# Altium PCB PCB1.PcbDoc (part 1 of 2)
Units mm, origin at the board's own origin, x right, y up, seen from the top; angles counter-clockwise.
Board outline 100 x 100 mm, 2 copper layers (Top Layer, Bottom Layer); 16 components, 62 nets, 154 pads, 23 vias.
Unrouted connection lines stored in the file: 17.
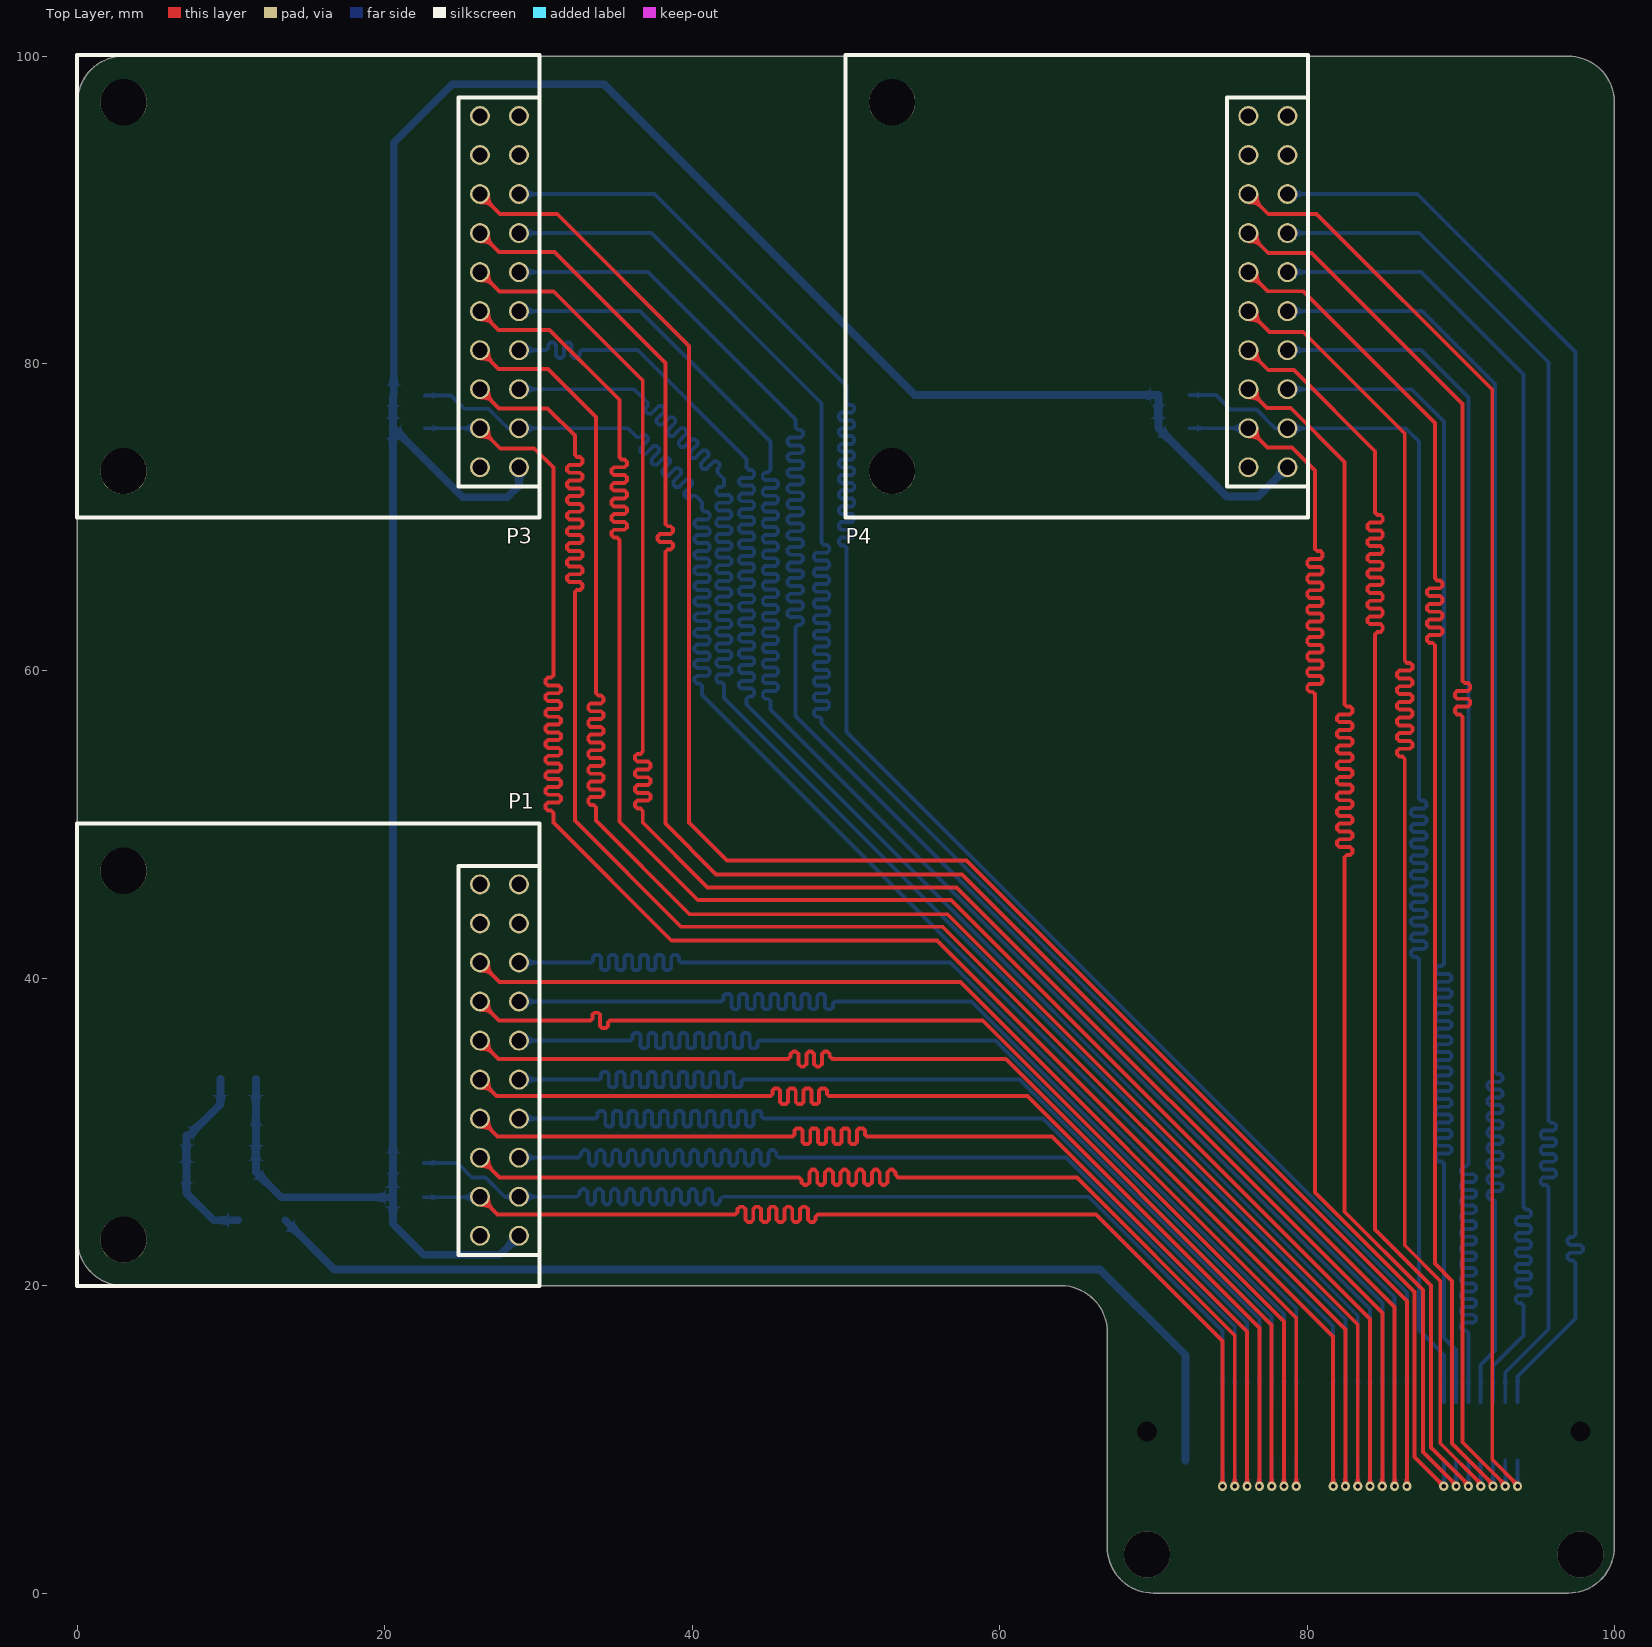
[diagram p0: Top Layer view]
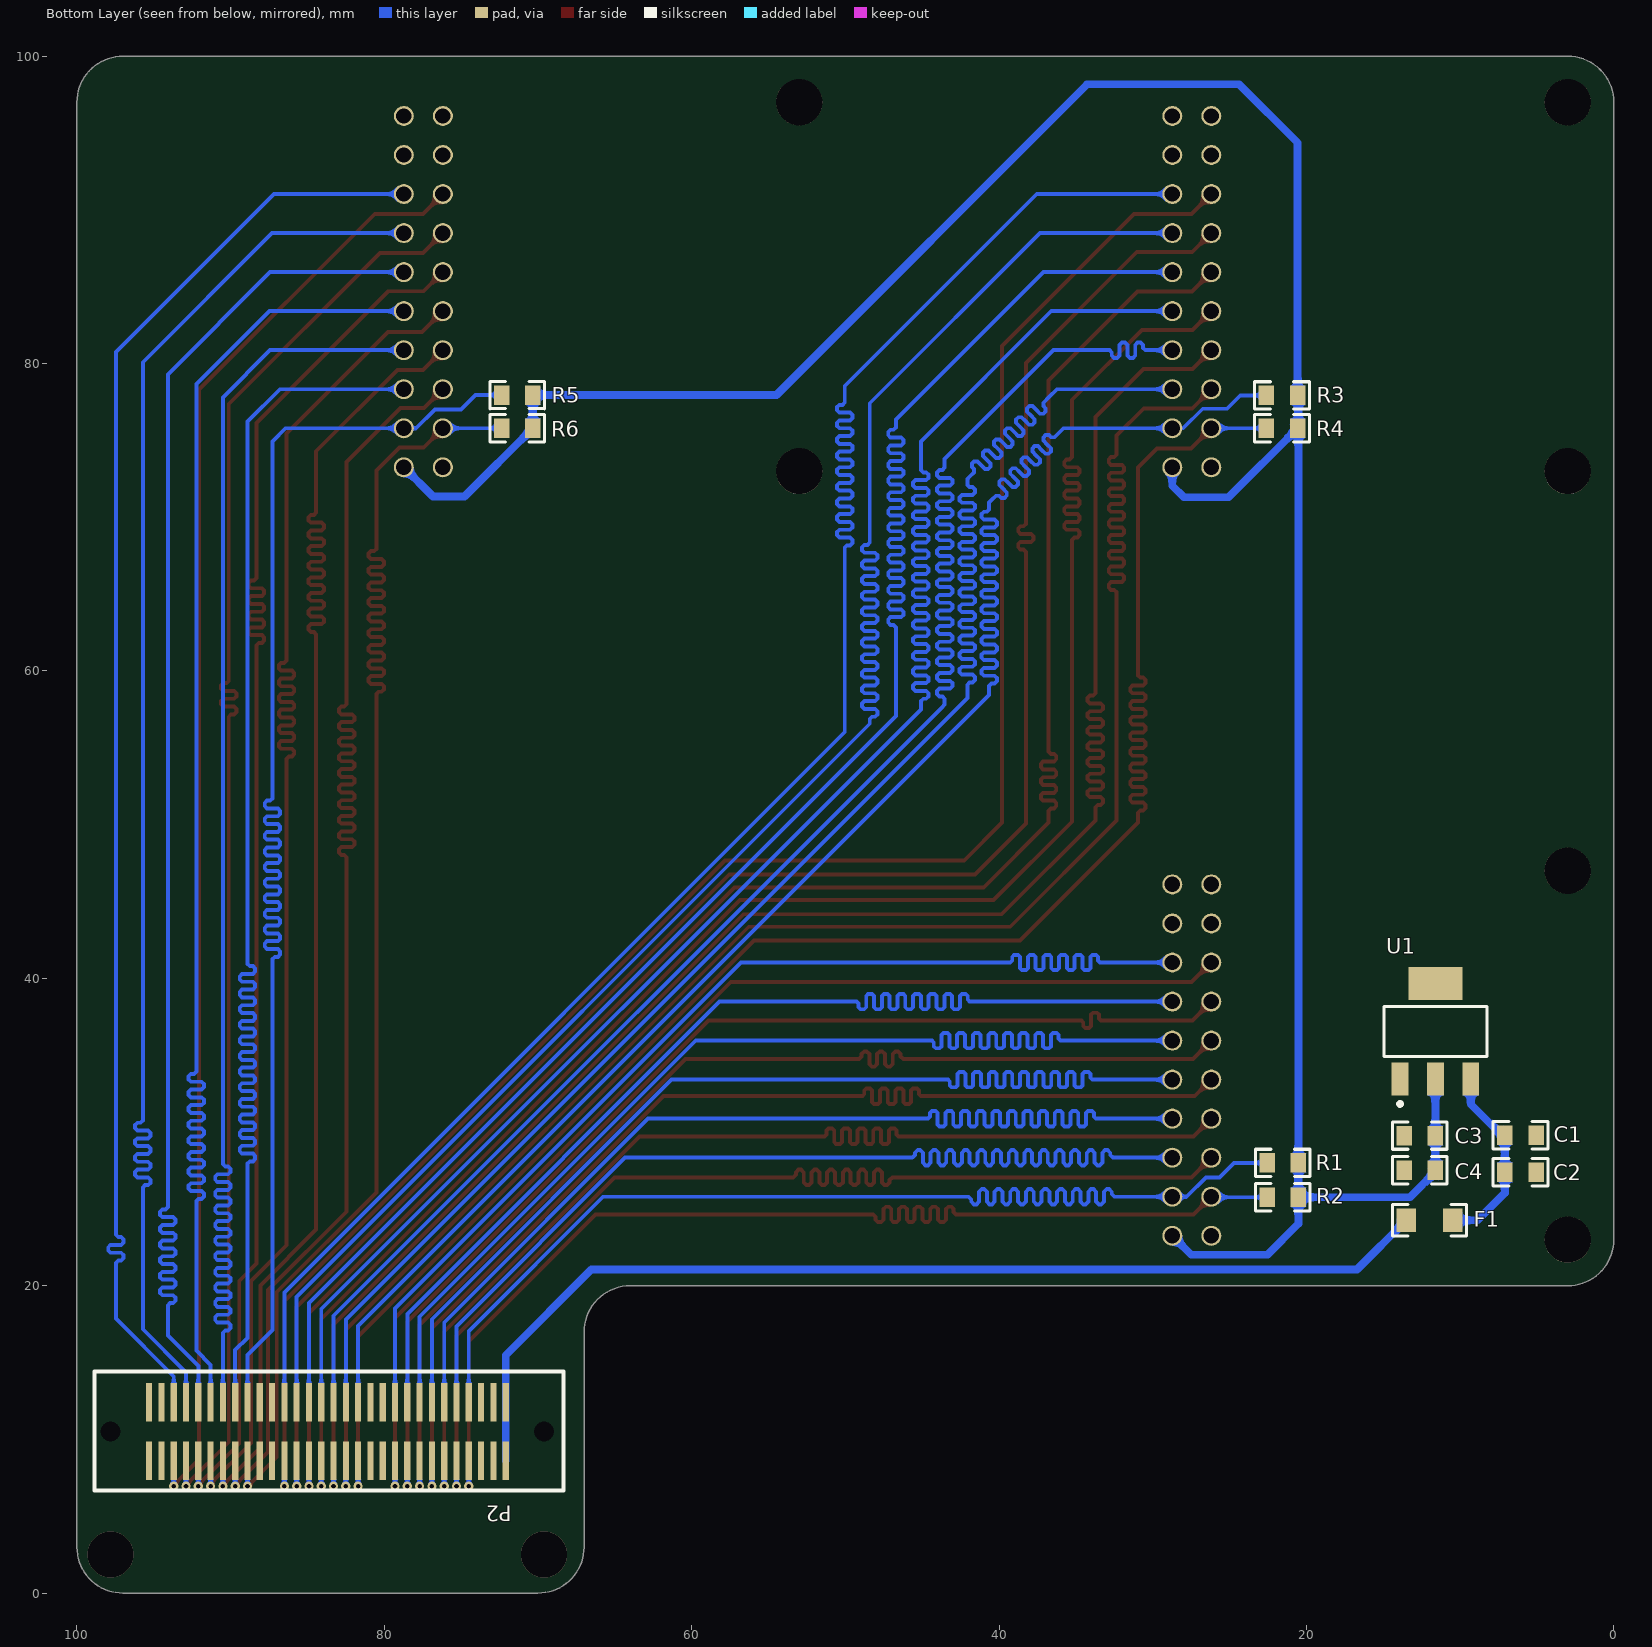
[diagram p1: Bottom Layer view, seen from below]
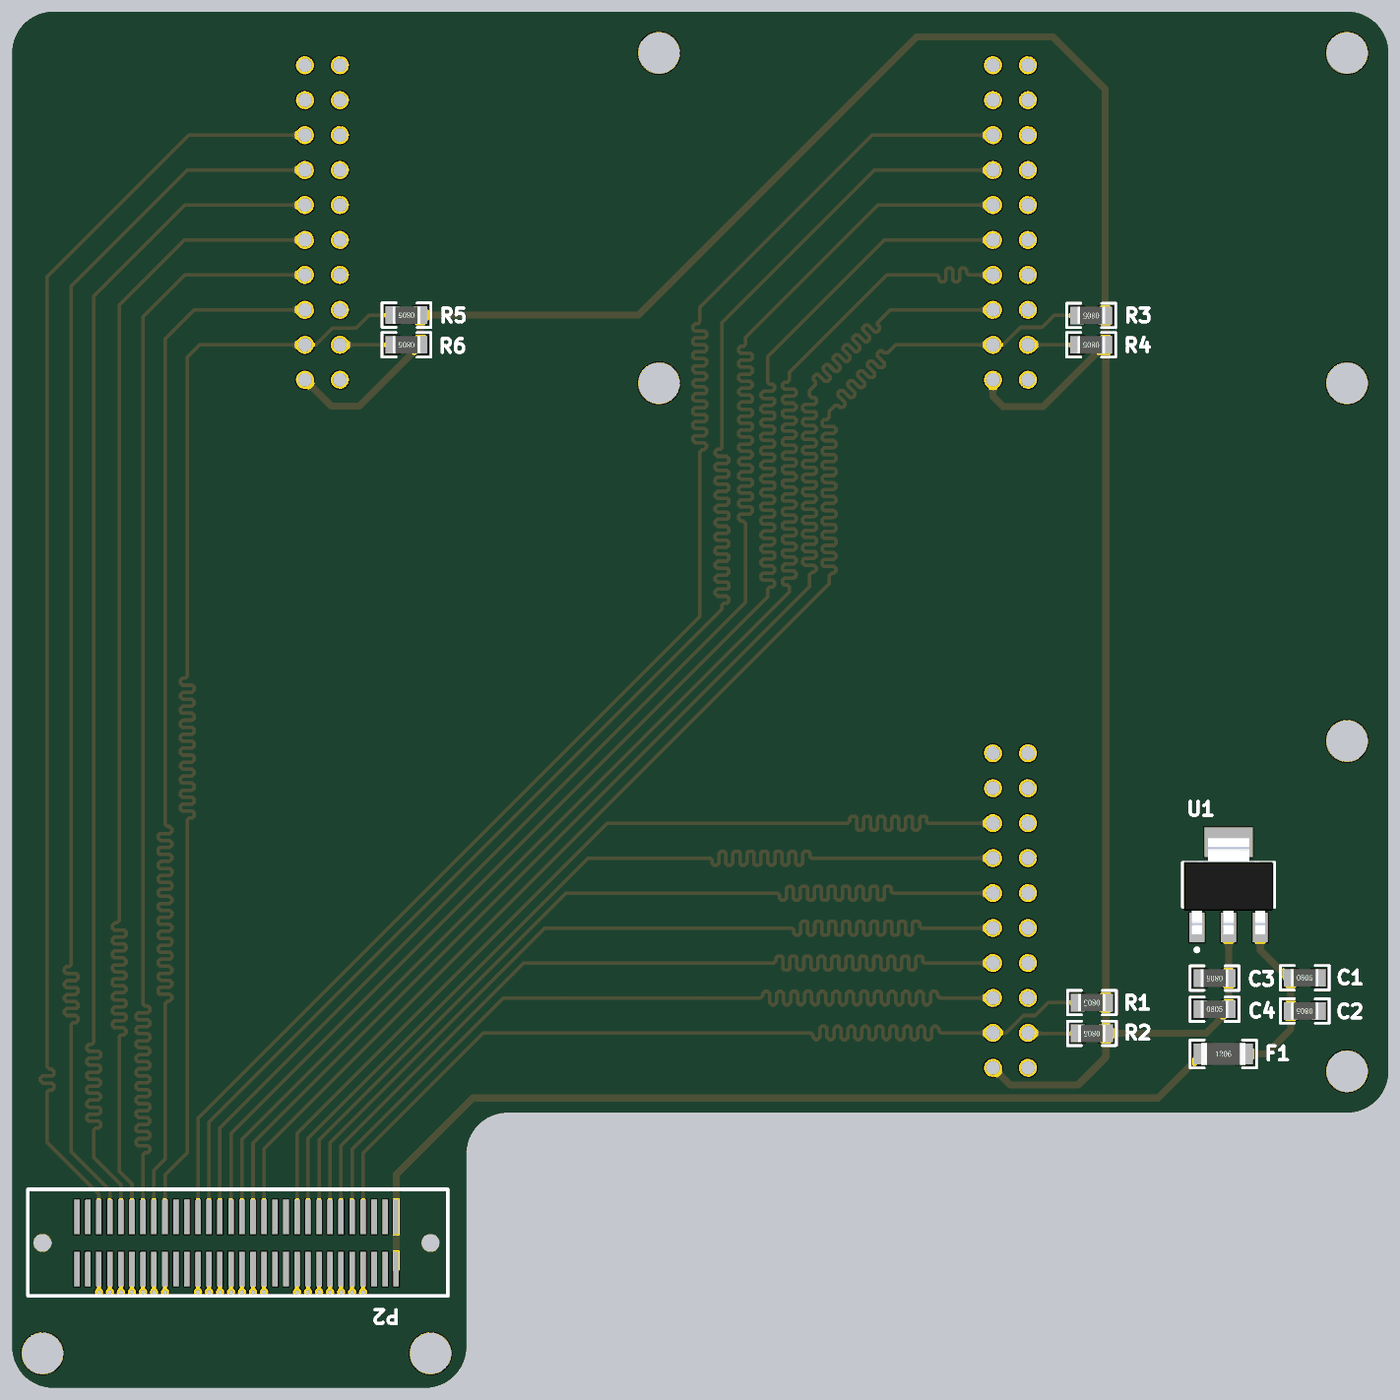
[diagram p3: 3D render of the assembled board from below, using the file's embedded part models]

## Layer stack, top to bottom
Top Solder: solder mask 0.0102, Solder Resist, Dk 3.5
Top Layer: signal copper 0.0356
Dielectric 1: dielectric 0.32, FR-4, Dk 4.8
Bottom Layer: signal copper 0.0356
Bottom Solder: solder mask 0.0102, Solder Resist, Dk 3.5

## Board outline
3,20 cw(c3,23) 0,23 0,97 cw(c3,97) 3,100 97,100 cw(c97,97) 100,97 100,3 cw(c97,3) 97,0 70,0 cw(c70,3) 67,3 67,16.975 ccw(c63.987,16.987) 64,20

## Design rules (kind name [scope] priority, off if disabled: settings)
Clearance [All] p1: gap=0.2
Length Length_2 [InNetClass('C2')] p1: maxlimit=123 minlimit=122
Length Length_1 [InNetClass('C1')] p2: maxlimit=76 minlimit=75
Length Length_3 [InNetClass('C3')] p3: maxlimit=96 minlimit=95
PolygonConnect [All] p1: connectstyle=Relief reliefconductorwidth=0.254 reliefentries=4 polygonreliefangle="90 Angle" airgapwidth=0.254
RoutingVias [All] p1: holewidth=0.3 width=0.6 viastyle="Through Hole" minholewidth=0.3 minwidth=0.6 maxholewidth=6 maxwidth=10
SolderMaskExpansion [All] p1: expansion=0.102
Width [All] p1: maxlimit=0.508 minlimit=0.127 preferedwidth=0.254
30 further rules are at their usual default settings.

## Classes and differential pairs
net class C1: D0_1 D1_1 D2_1 D3_1 D4_1 D5_1 D6_1 D7_1 HS_1 PCLK_1 SCK_1 SDA_1 VS_1 XCLK_1
net class C2: D0_2 D1_2 D2_2 D3_2 D4_2 D5_2 D6_2 D7_2 HS_2 PCLK_2 SCK_2 SDA_2 VS_2 XCLK_2
net class C3: D0_3 D1_3 D2_3 D3_3 D4_3 D5_3 D6_3 D7_3 HS_3 PCLK_3 SCK_3 SDA_3 VS_3 XCLK_3

## Components (designator, comment, footprint, x,y, rotation, side; value= is the part's Value field where it differs from the comment)
C1 "Cap2" R0805 6.071,29.794 r180 bottom
C2 "Cap" R0805 6.071,27.381 r0 bottom
C3 "Cap2" R0805 12.624,29.769 r0 bottom
C4 "Cap" R0805 12.624,27.508 r180 bottom
F1 "Fuse 1" R1206 11.989,24.257 r180 bottom (schematic designator F?)
P1 "Header 10X2" PCBComponent_1 0,20 r90 top locked
P2 "Header 30X2" BTBCON_0.8mm_60P 72.1,12.425 r270 bottom locked
P3 "Header 10X2" PCBComponent_1 0,70 r90 top locked
P4 "Header 10X2" PCBComponent_1 50,70 r90 top locked
R1 "Res1" R0805 21.539,27.991 r0 bottom
R2 "Res1" R0805 21.539,25.756 r0 bottom
R3 "Res1" R0805 21.59,77.927 r0 bottom
R4 "Res1" R0805 21.59,75.794 r0 bottom
R5 "Res1" R0805 71.349,77.953 r0 bottom
R6 "Res1" R0805 71.349,75.794 r0 bottom
U1 "AMS1117-33" "SOT-223   AMS1117" 11.608,36.551 r180 bottom

## Footprints (in the part's own frame and the unit in brackets; to place one, negate y for a bottom-side part, rotate by r counter-clockwise, add the part's x,y. Pads: shape width x height; smd on the part's side, far side on the other; paste and mask are expansions set on the pad)
BTBCON_0.8mm_60P [mm]
  rect 2.5x0.4 smd: 1(0,0) 2(3.8,0) 3(0,-0.8) 4(3.8,-0.8) 5(0,-1.6) 6(3.8,-1.6) 7(0,-2.4) 8(3.8,-2.4) 9(0,-3.2) 10(3.8,-3.2) 11(0,-4) 12(3.8,-4) 13(0,-4.8) 14(3.8,-4.8) 15(0,-5.6) 16(3.8,-5.6) 17(0,-6.4) 18(3.8,-6.4) 19(0,-7.2) 20(3.8,-7.2) 21(0,-8) 22(3.8,-8) 23(0,-8.8) 24(3.8,-8.8) 25(0,-9.6) 26(3.8,-9.6) 27(0,-10.4) 28(3.8,-10.4) 29(0,-11.2) 30(3.8,-11.2) 31(0,-12) 32(3.8,-12) 33(0,-12.8) 34(3.8,-12.8) 35(0,-13.6) 36(3.8,-13.6) 37(0,-14.4) 38(3.8,-14.4) 39(0,-15.2) 40(3.8,-15.2) 41(0,-16) 42(3.8,-16) 43(0,-16.8) 44(3.8,-16.8) 45(0,-17.6) 46(3.8,-17.6) 47(0,-18.4) 48(3.8,-18.4) 49(0,-19.2) 50(3.8,-19.2) 51(0,-20) 52(3.8,-20) 53(0,-20.8) 54(3.8,-20.8) 55(0,-21.6) 56(3.8,-21.6) 57(0,-22.4) 58(3.8,-22.4) 59(0,-23.2) 60(3.8,-23.2)
  round 1 hole 1.3: 61(1.9,2.5) 62(1.9,-25.7)
  silkscreen extent -2,-26.75 5.75,3.75
PCBComponent_1 [mm]
  round 3 hole 3: 0(3,-3) 0(27,-3)
  round 1.3 hole 1: 1(3.251,-28.727) 2(3.251,-26.187) 3(5.791,-28.727) 4(5.791,-26.187) 5(8.331,-28.727) 6(8.331,-26.187) 7(10.871,-28.727) 8(10.871,-26.187) 9(13.411,-28.727) 10(13.411,-26.187) 11(15.951,-28.727) 12(15.951,-26.187) 13(18.491,-28.727) 14(18.491,-26.187) 15(21.031,-28.727) 16(21.031,-26.187) 17(23.571,-28.727) 18(23.571,-26.187) 19(26.111,-28.727) 20(26.111,-26.187)
  silkscreen extent -0.01,-30.06 30.09,0.04
R0805 [mil]
  rect 40x50 smd: 1(-40,0) 2(40,0)
  silkscreen extent -70,-35 70,35, body extent -39,-25 39,25, height 22
R1206 [mil]
  rect 50x60 smd: 1(-60,0) 2(60,0)
  silkscreen extent -95,-40 95,40, body extent -63,-31 63,31, height 24
"SOT-223   AMS1117" [mm] "SOT-223/SC-73; 4 Leads; Body 6.7 x 7.3 mm, inc. leads (LxW max)"
  rect 1.1x2.15 smd: 1(-2.3,-3.1) 2(0,-3.1) 3(2.3,-3.1)
  rect 3.5x2.15 smd: 4(0,3.1)
  silkscreen extent -3.35,-4.85 3.35,1.63, body extent -3.25,-3.58 3.25,3.38, height 1.65

## Part data
C1 C2 C3 C4: "Capacitor"
F1: "Fuse"
P1 P3 P4: "Header, 10-Pin, Dual row"
P2: "Header, 30-Pin, Dual row"
R1 R2 R3 R4 R5 R6: "Resistor"
U1: library part "Volt Reg", "Voltage Regulator"

## Via types
v1: diameter 0.6, hole 0.3, Top Layer to Bottom Layer, 21 vias
v2: diameter 3, hole 3, Top Layer to Bottom Layer, 2 vias

## Nets (pads, with @x,y where several pads share a name; then routed paths per layer and width w, separated by ;. In a path a pad name is that pad's centre, name@x,y a point inside that pad or via, vN(x,y) a via of type N, cw(c..) or ccw(c..) an arc to the next point about the centre after c; other vN are vias at no path point)
3V3: C3.1 C4.2 P1.1 P3.1 P4.1 R1.1 R2.1 R3.1 R4.1 R5.1 R6.1 U1.2 | length 180
  Bottom Layer w0.508: U1.2@11.608,33.451 C4.2@11.608,27.508 11.608,27.407 13.259,25.756 R2.1@20.523,25.756 ; R4.1@20.574,75.794 25.07,71.298 27.965,71.298 28.727,72.06 P3.1@28.727,73.251 ; P1.1@28.727,23.251 27.498,22.022 22.53,22.022 20.523,24.028 R2.1@20.523,25.756 ; P4.1@78.727,73.251 76.825,71.349 74.778,71.349 R6.1@70.333,75.794 R5.1@70.333,77.953 54.483,77.953 34.29,98.146 34.29,98.171 24.384,98.171 20.574,94.361 R3.1@20.574,77.927 20.523,77.876 R1.1@20.523,27.991 R2.1@20.523,25.756
5V: F1.1 P2.1 P2.2 | length 69.1
  Bottom Layer w0.508: F1.1@13.513,24.257 16.713,21.057 66.523,21.057 72.1,15.479 P2.1@72.1,12.425 P2.2@72.1,8.625
D0_1: P1.16 P2.20 | length 75.3
  Top Layer w0.254: P1.16@26.187,41.031 27.468,39.751 57.455,39.751 79.3,17.906 v1(79.3,6.948)
  Bottom Layer w0.254: v1(79.3,6.948) 79.3,7.17 P2.20@79.3,8.625
D0_2: P2.38 P3.16 | length 122.1
  Top Layer w0.254: P3.16@26.187,91.031 27.48,89.738 31.217,89.738 39.802,81.153 39.802,50.14 42.266,47.676 57.836,47.676 86.5,19.012 v1(86.5,6.948)
  Bottom Layer w0.254: v1(86.5,6.948) 86.5,7.17 P2.38@86.5,8.625
D0_3: P2.56 P4.16 | length 94.9
  Top Layer w0.254: P4.16@76.187,91.031 77.48,89.738 80.62,89.738 92.05,78.308 92.05,8.685 93.7,7.035 v1(93.7,6.948)
  Bottom Layer w0.254: v1(93.7,6.948) 93.7,7.17 P2.56@93.7,8.625
D1_1: P1.15 P2.19 | length 75.2
  Bottom Layer w0.254: P1.15@28.727,41.031 33.299,41.031 33.426,41.031 33.553,41.158 33.553,41.404 33.68,41.531 33.934,41.531 34.061,41.404 34.061,41.031 34.061,40.658 34.188,40.531 34.442,40.531 34.569,40.658 34.569,41.031 34.569,41.404 34.696,41.531 34.95,41.531 35.077,41.404 35.077,41.031 35.077,40.658 35.204,40.531 35.458,40.531 35.585,40.658 35.585,41.031 35.585,41.404 35.712,41.531 35.966,41.531 36.093,41.404 36.093,41.031 36.093,40.658 36.22,40.531 36.474,40.531 36.601,40.658 36.601,41.031 36.601,41.404 36.728,41.531 36.982,41.531 37.109,41.404 37.109,41.031 37.109,40.658 37.236,40.531 37.49,40.531 37.617,40.658 37.617,41.031 37.617,41.404 37.744,41.531 37.998,41.531 38.125,41.404 38.125,41.031 38.125,40.658 38.252,40.531 38.506,40.531 38.633,40.658 38.633,41.031 38.633,41.404 38.76,41.531 39.014,41.531 39.141,41.404 39.141,41.158 39.268,41.031 40.361,41.031 56.784,41.031 79.3,18.515 P2.19@79.3,12.425
D1_2: P2.37 P3.15 | length 122.3
  Bottom Layer w0.254: P3.15@28.727,91.031 37.544,91.031 50.038,78.537 50.038,77.572 50.038,77.47 50.19,77.318 50.386,77.318 50.538,77.165 50.538,76.962 50.386,76.81 50.038,76.81 49.69,76.81 49.538,76.657 49.538,76.454 49.69,76.302 50.038,76.302 50.386,76.302 50.538,76.149 50.538,75.946 50.386,75.794 50.038,75.794 49.69,75.794 49.538,75.641 49.538,75.438 49.69,75.286 50.038,75.286 50.386,75.286 50.538,75.133 50.538,74.93 50.386,74.778 50.038,74.778 49.69,74.778 49.538,74.625 49.538,74.422 49.69,74.27 50.038,74.27 50.386,74.27 50.538,74.117 50.538,73.914 50.386,73.762 50.038,73.762 49.69,73.762 49.538,73.609 49.538,73.406 49.69,73.254 50.038,73.254 50.386,73.254 50.538,73.101 50.538,72.898 50.386,72.746 50.038,72.746 49.69,72.746 49.538,72.593 49.538,72.39 49.69,72.238 50.038,72.238 50.386,72.238 50.538,72.085 50.538,71.882 50.386,71.73 50.038,71.73 49.69,71.73 49.538,71.577 49.538,71.374 49.69,71.222 50.038,71.222 50.386,71.222 50.538,71.069 50.538,70.866 50.386,70.714 50.038,70.714 49.69,70.714 49.538,70.561 49.538,70.358 49.69,70.206 50.038,70.206 50.386,70.206 50.538,70.053 50.538,69.85 50.386,69.698 50.038,69.698 49.69,69.698 49.538,69.545 49.538,69.342 49.69,69.19 50.038,69.19 50.386,69.19 50.538,69.037 50.538,68.834 50.386,68.682 50.038,68.682 49.69,68.682 49.538,68.529 49.538,68.326 49.69,68.174 49.886,68.174 50.038,68.021 50.038,62.179 50.038,56.032 86.5,19.57 P2.37@86.5,12.425
D1_3: P2.55 P4.15 | length 95.2
  Bottom Layer w0.254: P4.15@78.727,91.031 87.175,91.031 97.46,80.747 97.46,24.536 97.46,23.317 97.307,23.165 97.112,23.165 96.96,23.012 96.96,22.809 97.112,22.657 97.46,22.657 97.807,22.657 97.96,22.504 97.96,22.301 97.807,22.149 97.46,22.149 97.112,22.149 96.96,21.996 96.96,21.793 97.112,21.641 97.307,21.641 97.46,21.488 97.46,21.387 97.46,17.856 93.7,14.096 P2.55@93.7,12.425
D2_1: P1.14 P2.18 | length 74.9
  Top Layer w0.254: P1.14@26.187,38.491 27.417,37.262 33.249,37.262 33.376,37.262 33.503,37.389 33.503,37.635 33.63,37.762 33.884,37.762 34.011,37.635 34.011,37.262 34.011,36.889 34.138,36.762 34.392,36.762 34.519,36.889 34.519,37.135 34.646,37.262 39.954,37.262 58.903,37.262 78.5,17.664 v1(78.5,6.948)
  Bottom Layer w0.254: v1(78.5,6.948) 78.5,7.17 P2.18@78.5,8.625
D2_2: P2.36 P3.14 | length 121.6
  Top Layer w0.254: P3.14@26.187,88.491 27.43,87.249 31.039,87.249 38.252,80.035 38.252,69.672 38.252,69.571 38.405,69.418 38.6,69.418 38.752,69.266 38.752,69.063 38.6,68.91 38.252,68.91 37.905,68.91 37.752,68.758 37.752,68.555 37.905,68.402 38.252,68.402 38.6,68.402 38.752,68.25 38.752,68.047 38.6,67.894 38.405,67.894 38.252,67.742 38.252,61.265 38.252,50.063 41.554,46.761 57.556,46.761 85.7,18.618 v1(85.7,6.948)
  Bottom Layer w0.254: v1(85.7,6.948) 85.7,7.17 P2.36@85.7,8.625
D2_3: P2.54 P4.14 | length 94.9
  Top Layer w0.254: P4.14@76.187,88.491 77.48,87.198 80.289,87.198 90.119,77.368 90.119,59.461 90.119,59.36 90.272,59.207 90.467,59.207 90.619,59.055 90.619,58.852 90.467,58.699 90.119,58.699 89.772,58.699 89.619,58.547 89.619,58.344 89.772,58.191 90.119,58.191 90.467,58.191 90.619,58.039 90.619,57.836 90.467,57.683 90.119,57.683 89.772,57.683 89.619,57.531 89.619,57.328 89.772,57.175 89.967,57.175 90.119,57.023 90.119,47.854 90.119,9.816 92.9,7.035 v1(92.9,6.948)
  Bottom Layer w0.254: v1(92.9,6.948) 92.9,7.17 P2.54@92.9,8.625
D3_1: P1.13 P2.17 | length 75.7
  Bottom Layer w0.254: P1.13@28.727,38.491 39.014,38.491 41.91,38.491 42.037,38.618 42.037,38.864 42.164,38.991 42.418,38.991 42.545,38.864 42.545,38.491 42.545,38.118 42.672,37.991 42.926,37.991 43.053,38.118 43.053,38.491 43.053,38.864 43.18,38.991 43.434,38.991 43.561,38.864 43.561,38.491 43.561,38.118 43.688,37.991 43.942,37.991 44.069,38.118 44.069,38.491 44.069,38.864 44.196,38.991 44.45,38.991 44.577,38.864 44.577,38.491 44.577,38.118 44.704,37.991 44.958,37.991 45.085,38.118 45.085,38.491 45.085,38.864 45.212,38.991 45.466,38.991 45.593,38.864 45.593,38.491 45.593,38.118 45.72,37.991 45.974,37.991 46.101,38.118 46.101,38.491 46.101,38.864 46.228,38.991 46.482,38.991 46.609,38.864 46.609,38.491 46.609,38.118 46.736,37.991 46.99,37.991 47.117,38.118 47.117,38.491 47.117,38.864 47.244,38.991 47.498,38.991 47.625,38.864 47.625,38.491 47.625,38.118 47.752,37.991 48.006,37.991 48.133,38.118 48.133,38.491 48.133,38.864 48.26,38.991 48.514,38.991 48.641,38.864 48.641,38.491 48.641,38.118 48.768,37.991 49.022,37.991 49.149,38.118 49.149,38.364 49.276,38.491 49.403,38.491 58.181,38.491 78.5,18.172 P2.17@78.5,12.425
D3_2: P2.35 P3.13 | length 122.6
  Bottom Layer w0.254: P3.13@28.727,88.491 37.34,88.491 48.412,77.419 48.412,70.739 48.412,68.351 48.565,68.199 48.76,68.199 48.912,68.047 48.912,67.843 48.76,67.691 48.412,67.691 48.065,67.691 47.912,67.539 47.912,67.335 48.065,67.183 48.412,67.183 48.76,67.183 48.912,67.031 48.912,66.827 48.76,66.675 48.412,66.675 48.065,66.675 47.912,66.523 47.912,66.319 48.065,66.167 48.412,66.167 48.76,66.167 48.912,66.015 48.912,65.811 48.76,65.659 48.412,65.659 48.065,65.659 47.912,65.507 47.912,65.303 48.065,65.151 48.412,65.151 48.76,65.151 48.912,64.999 48.912,64.795 48.76,64.643 48.412,64.643 48.065,64.643 47.912,64.491 47.912,64.287 48.065,64.135 48.412,64.135 48.76,64.135 48.912,63.983 48.912,63.779 48.76,63.627 48.412,63.627 48.065,63.627 47.912,63.475 47.912,63.271 48.065,63.119 48.412,63.119 48.76,63.119 48.912,62.967 48.912,62.763 48.76,62.611 48.412,62.611 48.065,62.611 47.912,62.459 47.912,62.255 48.065,62.103 48.412,62.103 48.76,62.103 48.912,61.951 48.912,61.747 48.76,61.595 48.412,61.595 48.065,61.595 47.912,61.443 47.912,61.239 48.065,61.087 48.412,61.087 48.76,61.087 48.912,60.935 48.912,60.731 48.76,60.579 48.412,60.579 48.065,60.579 47.912,60.427 47.912,60.223 48.065,60.071 48.412,60.071 48.76,60.071 48.912,59.919 48.912,59.715 48.76,59.563 48.412,59.563 48.065,59.563 47.912,59.411 47.912,59.207 48.065,59.055 48.412,59.055 48.76,59.055 48.912,58.903 48.912,58.699 48.76,58.547 48.412,58.547 48.065,58.547 47.912,58.395 47.912,58.191 48.065,58.039 48.412,58.039 48.76,58.039 48.912,57.887 48.912,57.683 48.76,57.531 48.412,57.531 48.065,57.531 47.912,57.379 47.912,57.175 48.065,57.023 48.26,57.023 48.412,56.871 48.412,56.769 48.412,56.566 85.7,19.278 P2.35@85.7,12.425
D3_3: P2.53 P4.13 | length 95.7
  Bottom Layer w0.254: P4.13@78.727,88.491 87.302,88.491 95.707,80.086 95.707,30.861 95.707,30.759 95.86,30.607 96.055,30.607 96.207,30.455 96.207,30.251 96.055,30.099 95.707,30.099 95.36,30.099 95.207,29.947 95.207,29.743 95.36,29.591 95.707,29.591 96.055,29.591 96.207,29.439 96.207,29.235 96.055,29.083 95.707,29.083 95.36,29.083 95.207,28.931 95.207,28.727 95.36,28.575 95.707,28.575 96.055,28.575 96.207,28.423 96.207,28.219 96.055,28.067 95.707,28.067 95.36,28.067 95.207,27.915 95.207,27.711 95.36,27.559 95.707,27.559 96.055,27.559 96.207,27.407 96.207,27.203 96.055,27.051 95.707,27.051 95.36,27.051 95.207,26.899 95.207,26.695 95.36,26.543 95.555,26.543 95.707,26.391 95.707,22.606 95.707,17.17 92.9,14.363 P2.53@92.9,12.425
D4_1: P1.12 P2.16 | length 75.1
  Top Layer w0.254: P1.12@26.187,35.951 27.391,34.747 46.152,34.747 46.228,34.747 46.406,34.925 46.406,35.069 46.584,35.247 46.736,35.247 46.914,35.069 46.914,34.747 46.914,34.425 47.092,34.247 47.244,34.247 47.422,34.425 47.422,34.747 47.422,35.069 47.6,35.247 47.752,35.247 47.93,35.069 47.93,34.747 47.93,34.425 48.108,34.247 48.26,34.247 48.438,34.425 48.438,34.747 48.438,35.069 48.616,35.247 48.768,35.247 48.946,35.069 48.946,34.925 49.124,34.747 52.273,34.747 60.401,34.747 77.7,17.448 v1(77.7,6.948)
  Bottom Layer w0.254: v1(77.7,6.948) 77.7,7.17 P2.16@77.7,8.625
D4_2: P2.34 P3.12 | length 122.1
  Top Layer w0.254: P3.12@26.187,85.951 27.455,84.684 30.988,84.684 36.779,78.892 36.779,59.487 36.779,54.762 36.627,54.61 36.432,54.61 36.279,54.458 36.279,54.254 36.432,54.102 36.779,54.102 37.127,54.102 37.279,53.95 37.279,53.746 37.127,53.594 36.779,53.594 36.432,53.594 36.279,53.442 36.279,53.238 36.432,53.086 36.779,53.086 37.127,53.086 37.279,52.934 37.279,52.73 37.127,52.578 36.779,52.578 36.432,52.578 36.279,52.426 36.279,52.222 36.432,52.07 36.779,52.07 37.127,52.07 37.279,51.918 37.279,51.714 37.127,51.562 36.779,51.562 36.432,51.562 36.279,51.41 36.279,51.206 36.432,51.054 36.627,51.054 36.779,50.902 36.779,50.8 36.779,50.14 40.996,45.923 57.201,45.923 84.9,18.224 v1(84.9,6.948)
  Bottom Layer w0.254: v1(84.9,6.948) 84.9,7.17 P2.34@84.9,8.625
D4_3: P2.52 P4.12 | length 95
  Top Layer w0.254: P4.12@76.187,85.951 77.43,84.709 79.731,84.709 88.316,76.124 88.316,75.311 88.316,66.04 88.468,65.888 88.663,65.888 88.816,65.735 88.816,65.532 88.663,65.38 88.316,65.38 87.968,65.38 87.816,65.227 87.816,65.024 87.968,64.872 88.316,64.872 88.663,64.872 88.816,64.719 88.816,64.516 88.663,64.364 88.316,64.364 87.968,64.364 87.816,64.211 87.816,64.008 87.968,63.856 88.316,63.856 88.663,63.856 88.816,63.703 88.816,63.5 88.663,63.348 88.316,63.348 87.968,63.348 87.816,63.195 87.816,62.992 87.968,62.84 88.316,62.84 88.663,62.84 88.816,62.687 88.816,62.484 88.663,62.332 88.316,62.332 87.968,62.332 87.816,62.179 87.816,61.976 87.968,61.824 88.163,61.824 88.316,61.671 88.316,61.57 88.316,21.438 89.433,20.32 89.433,9.728 92.1,7.062 v1(92.1,6.948)
  Bottom Layer w0.254: v1(92.1,6.948) 92.1,7.17 P2.52@92.1,8.625
D5_1: P1.11 P2.15 | length 75.4
  Bottom Layer w0.254: P1.11@28.727,35.951 35.865,35.951 35.992,35.951 36.119,36.078 36.119,36.324 36.246,36.451 36.5,36.451 36.627,36.324 36.627,35.951 36.627,35.578 36.754,35.451 37.008,35.451 37.135,35.578 37.135,35.951 37.135,36.324 37.262,36.451 37.516,36.451 37.643,36.324 37.643,35.951 37.643,35.578 37.77,35.451 38.024,35.451 38.151,35.578 38.151,35.951 38.151,36.324 38.278,36.451 38.532,36.451 38.659,36.324 38.659,35.951 38.659,35.578 38.786,35.451 39.04,35.451 39.167,35.578 39.167,35.951 39.167,36.324 39.294,36.451 39.548,36.451 39.675,36.324 39.675,35.951 39.675,35.578 39.802,35.451 40.056,35.451 40.183,35.578 40.183,35.951 40.183,36.324 40.31,36.451 40.564,36.451 40.691,36.324 40.691,35.951 40.691,35.578 40.818,35.451 41.072,35.451 41.199,35.578 41.199,35.951 41.199,36.324 41.326,36.451 41.58,36.451 41.707,36.324 41.707,35.951 41.707,35.578 41.834,35.451 42.088,35.451 42.215,35.578 42.215,35.951 42.215,36.324 42.342,36.451 42.596,36.451 42.723,36.324 42.723,35.951 42.723,35.578 42.85,35.451 43.104,35.451 43.231,35.578 43.231,35.951 43.231,36.324 43.358,36.451 43.612,36.451 43.739,36.324 43.739,35.951 43.739,35.578 43.866,35.451 44.12,35.451 44.247,35.578 44.247,35.824 44.374,35.951 47.473,35.951 59.731,35.951 77.7,17.982 P2.15@77.7,12.425
D5_2: P2.33 P3.11 | length 122.1
  Bottom Layer w0.254: P3.11@28.727,85.951 37.112,85.951 46.711,76.352 46.711,75.946 46.711,75.844 46.863,75.692 47.058,75.692 47.211,75.54 47.211,75.336 47.058,75.184 46.711,75.184 46.363,75.184 46.211,75.032 46.211,74.828 46.363,74.676 46.711,74.676 47.058,74.676 47.211,74.524 47.211,74.32 47.058,74.168 46.711,74.168 46.363,74.168 46.211,74.016 46.211,73.812 46.363,73.66 46.711,73.66 47.058,73.66 47.211,73.508 47.211,73.304 47.058,73.152 46.711,73.152 46.363,73.152 46.211,73 46.211,72.796 46.363,72.644 46.711,72.644 47.058,72.644 47.211,72.492 47.211,72.288 47.058,72.136 46.711,72.136 46.363,72.136 46.211,71.984 46.211,71.78 46.363,71.628 46.711,71.628 47.058,71.628 47.211,71.476 47.211,71.272 47.058,71.12 46.711,71.12 46.363,71.12 46.211,70.968 46.211,70.764 46.363,70.612 46.711,70.612 47.058,70.612 47.211,70.46 47.211,70.256 47.058,70.104 46.711,70.104 46.363,70.104 46.211,69.952 46.211,69.748 46.363,69.596 46.711,69.596 47.058,69.596 47.211,69.444 47.211,69.24 47.058,69.088 46.711,69.088 46.363,69.088 46.211,68.936 46.211,68.732 46.363,68.58 46.711,68.58 47.058,68.58 47.211,68.428 47.211,68.224 47.058,68.072 46.711,68.072 46.363,68.072 46.211,67.92 46.211,67.716 46.363,67.564 46.711,67.564 47.058,67.564 47.211,67.412 47.211,67.208 47.058,67.056 46.711,67.056 46.363,67.056 46.211,66.904 46.211,66.7 46.363,66.548 46.711,66.548 47.058,66.548 47.211,66.396 47.211,66.192 47.058,66.04 46.711,66.04 46.363,66.04 46.211,65.888 46.211,65.684 46.363,65.532 46.711,65.532 47.058,65.532 47.211,65.38 47.211,65.176 47.058,65.024 46.711,65.024 46.363,65.024 46.211,64.872 46.211,64.668 46.363,64.516 46.711,64.516 47.058,64.516 47.211,64.364 47.211,64.16 47.058,64.008 46.711,64.008 46.363,64.008 46.211,63.856 46.211,63.652 46.363,63.5 46.711,63.5 47.058,63.5 47.211,63.348 47.211,63.144 47.058,62.992 46.863,62.992 46.711,62.84 46.711,58.395 46.711,57.074 84.9,18.884 P2.33@84.9,12.425
D5_3: P2.51 P4.11 | length 95.5
  Bottom Layer w0.254: P4.11@78.727,85.951 87.429,85.951 94.082,79.299 94.082,26.924 94.082,25.121 94.234,24.968 94.429,24.968 94.582,24.816 94.582,24.613 94.429,24.46 94.082,24.46 93.734,24.46 93.582,24.308 93.582,24.105 93.734,23.952 94.082,23.952 94.429,23.952 94.582,23.8 94.582,23.597 94.429,23.444 94.082,23.444 93.734,23.444 93.582,23.292 93.582,23.089 93.734,22.936 94.082,22.936 94.429,22.936 94.582,22.784 94.582,22.581 94.429,22.428 94.082,22.428 93.734,22.428 93.582,22.276 93.582,22.073 93.734,21.92 94.082,21.92 94.429,21.92 94.582,21.768 94.582,21.565 94.429,21.412 94.082,21.412 93.734,21.412 93.582,21.26 93.582,21.057 93.734,20.904 94.082,20.904 94.429,20.904 94.582,20.752 94.582,20.549 94.429,20.396 94.082,20.396 93.734,20.396 93.582,20.244 93.582,20.041 93.734,19.888 94.082,19.888 94.429,19.888 94.582,19.736 94.582,19.533 94.429,19.38 94.082,19.38 93.734,19.38 93.582,19.228 93.582,19.025 93.734,18.872 93.929,18.872 94.082,18.72 94.082,18.618 94.082,16.764 92.1,14.782 P2.51@92.1,12.425
D6_1: P1.10 P2.14 | length 75.2
  Top Layer w0.254: P1.10@26.187,33.411 27.264,32.334 44.958,32.334 45.085,32.334 45.212,32.461 45.212,32.707 45.339,32.834 45.593,32.834 45.72,32.707 45.72,32.334 45.72,31.961 45.847,31.834 46.101,31.834 46.228,31.961 46.228,32.334 46.228,32.707 46.355,32.834 46.609,32.834 46.736,32.707 46.736,32.334 46.736,31.961 46.863,31.834 47.117,31.834 47.244,31.961 47.244,32.334 47.244,32.707 47.371,32.834 47.625,32.834 47.752,32.707 47.752,32.334 47.752,31.961 47.879,31.834 48.133,31.834 48.26,31.961 48.26,32.334 48.26,32.707 48.387,32.834 48.641,32.834 48.768,32.707 48.768,32.461 48.895,32.334 54.051,32.334 61.824,32.334 76.9,17.258 v1(76.9,6.948)
  Bottom Layer w0.254: v1(76.9,6.948) 76.9,7.17 P2.14@76.9,8.625
D6_2: P2.32 P3.10 | length 121.8
  Top Layer w0.254: P3.10@26.187,83.411 27.404,82.194 30.709,82.194 35.255,77.648 35.255,74.016 35.255,73.914 35.408,73.762 35.603,73.762 35.755,73.609 35.755,73.406 35.603,73.254 35.255,73.254 34.908,73.254 34.755,73.101 34.755,72.898 34.908,72.746 35.255,72.746 35.603,72.746 35.755,72.593 35.755,72.39 35.603,72.238 35.255,72.238 34.908,72.238 34.755,72.085 34.755,71.882 34.908,71.73 35.255,71.73 35.603,71.73 35.755,71.577 35.755,71.374 35.603,71.222 35.255,71.222 34.908,71.222 34.755,71.069 34.755,70.866 34.908,70.714 35.255,70.714 35.603,70.714 35.755,70.561 35.755,70.358 35.603,70.206 35.255,70.206 34.908,70.206 34.755,70.053 34.755,69.85 34.908,69.698 35.255,69.698 35.603,69.698 35.755,69.545 35.755,69.342 35.603,69.19 35.255,69.19 34.908,69.19 34.755,69.037 34.755,68.834 34.908,68.682 35.103,68.682 35.255,68.529 35.255,59.309 35.255,50.19 40.361,45.085 56.845,45.085 84.1,17.83 v1(84.1,6.948)
  Bottom Layer w0.254: v1(84.1,6.948) 84.1,7.17 P2.32@84.1,8.625
D6_3: P2.50 P4.10 | length 95.4
  Top Layer w0.254: P4.10@76.187,83.411 77.557,82.042 79.756,82.042 86.36,75.438 86.36,60.782 86.36,60.681 86.512,60.528 86.708,60.528 86.86,60.376 86.86,60.173 86.708,60.02 86.36,60.02 86.012,60.02 85.86,59.868 85.86,59.665 86.012,59.512 86.36,59.512 86.708,59.512 86.86,59.36 86.86,59.157 86.708,59.004 86.36,59.004 86.012,59.004 85.86,58.852 85.86,58.649 86.012,58.496 86.36,58.496 86.708,58.496 86.86,58.344 86.86,58.141 86.708,57.988 86.36,57.988 86.012,57.988 85.86,57.836 85.86,57.633 86.012,57.48 86.36,57.48 86.708,57.48 86.86,57.328 86.86,57.125 86.708,56.972 86.36,56.972 86.012,56.972 85.86,56.82 85.86,56.617 86.012,56.464 86.36,56.464 86.708,56.464 86.86,56.312 86.86,56.109 86.708,55.956 86.36,55.956 86.012,55.956 85.86,55.804 85.86,55.601 86.012,55.448 86.36,55.448 86.708,55.448 86.86,55.296 86.86,55.093 86.708,54.94 86.36,54.94 86.012,54.94 85.86,54.788 85.86,54.585 86.012,54.432 86.208,54.432 86.36,54.28 86.36,45.872 86.36,22.631 88.671,20.32 88.671,9.754 91.3,7.125 v1(91.3,6.948)
  Bottom Layer w0.254: v1(91.3,6.948) 91.3,7.17 P2.50@91.3,8.625
D7_1: P1.9 P2.13 | length 75.2
  Bottom Layer w0.254: P1.9@28.727,33.411 33.807,33.411 33.934,33.411 34.061,33.538 34.061,33.784 34.188,33.911 34.442,33.911 34.569,33.784 34.569,33.411 34.569,33.038 34.696,32.911 34.95,32.911 35.077,33.038 35.077,33.411 35.077,33.784 35.204,33.911 35.458,33.911 35.585,33.784 35.585,33.411 35.585,33.038 35.712,32.911 35.966,32.911 36.093,33.038 36.093,33.411 36.093,33.784 36.22,33.911 36.474,33.911 36.601,33.784 36.601,33.411 36.601,33.038 36.728,32.911 36.982,32.911 37.109,33.038 37.109,33.411 37.109,33.784 37.236,33.911 37.49,33.911 37.617,33.784 37.617,33.411 37.617,33.038 37.744,32.911 37.998,32.911 38.125,33.038 38.125,33.411 38.125,33.784 38.252,33.911 38.506,33.911 38.633,33.784 38.633,33.411 38.633,33.038 38.76,32.911 39.014,32.911 39.141,33.038 39.141,33.411 39.141,33.784 39.268,33.911 39.522,33.911 39.649,33.784 39.649,33.411 39.649,33.038 39.776,32.911 40.03,32.911 40.157,33.038 40.157,33.411 40.157,33.784 40.284,33.911 40.538,33.911 40.665,33.784 40.665,33.411 40.665,33.038 40.792,32.911 41.046,32.911 41.173,33.038 41.173,33.411 41.173,33.784 41.3,33.911 41.554,33.911 41.681,33.784 41.681,33.411 41.681,33.038 41.808,32.911 42.062,32.911 42.189,33.038 42.189,33.411 42.189,33.784 42.316,33.911 42.57,33.911 42.697,33.784 42.697,33.411 42.697,33.038 42.824,32.911 43.078,32.911 43.205,33.038 43.205,33.284 43.332,33.411 46.634,33.411 61.305,33.411 76.9,17.817 P2.13@76.9,12.425
D7_2: P2.31 P3.9 | length 122.2
  Bottom Layer w0.254: P3.9@28.727,83.411 36.604,83.411 45.085,74.93 45.085,73.076 44.933,72.923 44.737,72.923 44.585,72.771 44.585,72.568 44.737,72.415 45.085,72.415 45.433,72.415 45.585,72.263 45.585,72.06 45.433,71.907 45.085,71.907 44.737,71.907 44.585,71.755 44.585,71.552 44.737,71.399 45.085,71.399 45.433,71.399 45.585,71.247 45.585,71.044 45.433,70.891 45.085,70.891 44.737,70.891 44.585,70.739 44.585,70.536 44.737,70.383 45.085,70.383 45.433,70.383 45.585,70.231 45.585,70.028 45.433,69.875 45.085,69.875 44.737,69.875 44.585,69.723 44.585,69.52 44.737,69.367 45.085,69.367 45.433,69.367 45.585,69.215 45.585,69.012 45.433,68.859 45.085,68.859 44.737,68.859 44.585,68.707 44.585,68.504 44.737,68.351 45.085,68.351 45.433,68.351 45.585,68.199 45.585,67.996 45.433,67.843 45.085,67.843 44.737,67.843 44.585,67.691 44.585,67.488 44.737,67.335 45.085,67.335 45.433,67.335 45.585,67.183 45.585,66.98 45.433,66.827 45.085,66.827 44.737,66.827 44.585,66.675 44.585,66.472 44.737,66.319 45.085,66.319 45.433,66.319 45.585,66.167 45.585,65.964 45.433,65.811 45.085,65.811 44.737,65.811 44.585,65.659 44.585,65.456 44.737,65.303 45.085,65.303 45.433,65.303 45.585,65.151 45.585,64.948 45.433,64.795 45.085,64.795 44.737,64.795 44.585,64.643 44.585,64.44 44.737,64.287 45.085,64.287 45.433,64.287 45.585,64.135 45.585,63.932 45.433,63.779 45.085,63.779 44.737,63.779 44.585,63.627 44.585,63.424 44.737,63.271 45.085,63.271 45.433,63.271 45.585,63.119 45.585,62.916 45.433,62.763 45.085,62.763 44.737,62.763 44.585,62.611 44.585,62.408 44.737,62.255 45.085,62.255 45.433,62.255 45.585,62.103 45.585,61.9 45.433,61.747 45.085,61.747 44.737,61.747 44.585,61.595 44.585,61.392 44.737,61.239 45.085,61.239 45.433,61.239 45.585,61.087 45.585,60.884 45.433,60.731 45.085,60.731 44.737,60.731 44.585,60.579 44.585,60.376 44.737,60.223 45.085,60.223 45.433,60.223 45.585,60.071 45.585,59.868 45.433,59.715 45.085,59.715 44.737,59.715 44.585,59.563 44.585,59.36 44.737,59.207 45.085,59.207 45.433,59.207 45.585,59.055 45.585,58.852 45.433,58.699 45.085,58.699 44.737,58.699 44.585,58.547 44.585,58.344 44.737,58.191 44.933,58.191 45.085,58.039 45.085,57.937 45.085,57.506 84.1,18.491 P2.31@84.1,12.425
D7_3: P2.49 P4.9 | length 95.1
  Bottom Layer w0.254: P4.9@78.727,83.411 87.48,83.411 92.227,78.664 92.227,36.652 92.227,33.934 92.38,33.782 92.575,33.782 92.727,33.63 92.727,33.426 92.575,33.274 92.227,33.274 91.88,33.274 91.727,33.122 91.727,32.918 91.88,32.766 92.227,32.766 92.575,32.766 92.727,32.614 92.727,32.41 92.575,32.258 92.227,32.258 91.88,32.258 91.727,32.106 91.727,31.902 91.88,31.75 92.227,31.75 92.575,31.75 92.727,31.598 92.727,31.394 92.575,31.242 92.227,31.242 91.88,31.242 91.727,31.09 91.727,30.886 91.88,30.734 92.227,30.734 92.575,30.734 92.727,30.582 92.727,30.378 92.575,30.226 92.227,30.226 91.88,30.226 91.727,30.074 91.727,29.87 91.88,29.718 92.227,29.718 92.575,29.718 92.727,29.566 92.727,29.362 92.575,29.21 92.227,29.21 91.88,29.21 91.727,29.058 91.727,28.854 91.88,28.702 92.227,28.702 92.575,28.702 92.727,28.55 92.727,28.346 92.575,28.194 92.227,28.194 91.88,28.194 91.727,28.042 91.727,27.838 91.88,27.686 92.227,27.686 92.575,27.686 92.727,27.534 92.727,27.33 92.575,27.178 92.227,27.178 91.88,27.178 91.727,27.026 91.727,26.822 91.88,26.67 92.227,26.67 92.575,26.67 92.727,26.518 92.727,26.314 92.575,26.162 92.227,26.162 91.88,26.162 91.727,26.01 91.727,25.806 91.88,25.654 92.075,25.654 92.227,25.502 92.227,25.4 92.227,15.773 91.3,14.846 P2.49@91.3,12.425
FREX_1: P1.19
FREX_2: P3.19
FREX_3: P4.19
GND: C1.2 C2.1 C3.2 C4.1 P1.2 P2.3 P2.4 P2.5 P2.6 P2.23 P2.24 P2.41 P2.42 P2.59 P2.60 P3.2 P4.2 U1.1
HS_1: P1.6 P2.10 | length 74.7
  Top Layer w0.254: P1.6@26.187,28.331 27.468,27.051 46.101,27.051 46.355,27.051 46.609,27.051 46.939,27.051 47.117,26.873 47.117,26.729 47.295,26.551 47.447,26.551 47.625,26.729 47.625,27.051 47.625,27.373 47.803,27.551 47.955,27.551 48.133,27.373 48.133,27.051 48.133,26.729 48.311,26.551 48.463,26.551 48.641,26.729 48.641,27.051 48.641,27.373 48.819,27.551 48.971,27.551 49.149,27.373 49.149,27.051 49.149,26.729 49.327,26.551 49.479,26.551 49.657,26.729 49.657,27.051 49.657,27.373 49.835,27.551 49.987,27.551 50.165,27.373 50.165,27.051 50.165,26.729 50.343,26.551 50.495,26.551 50.673,26.729 50.673,27.051 50.673,27.373 50.851,27.551 51.003,27.551 51.181,27.373 51.181,27.051 51.181,26.729 51.359,26.551 51.511,26.551 51.689,26.729 51.689,27.051 51.689,27.373 51.867,27.551 52.019,27.551 52.197,27.373 52.197,27.051 52.197,26.729 52.375,26.551 52.527,26.551 52.705,26.729 52.705,27.051 52.705,27.373 52.883,27.551 53.035,27.551 53.213,27.373 53.213,27.229 53.391,27.051 55.016,27.051 65.024,27.051 75.3,16.775 v1(75.3,6.948)
  Bottom Layer w0.254: v1(75.3,6.948) 75.3,7.17 P2.10@75.3,8.625